# Altium PCB S7CAS-PLEIADES-CARTE-MERE_P01.PcbDoc (part 3 of 9)
Units mil, origin at the board's own origin, x right, y up, seen from the top; angles counter-clockwise.
Board outline 6153 x 3696 mil, 16 copper layers (Top, Ground Plane 1, Signal Layer 1, Ground Plane 2, Signal Layer 2, Ground Plane 3, Power Plane, Ground Plane 4, Ground Plane 5, Power Plane 2, Ground Plane 6, Signal Layer 3, Ground Plane 7, Signal Layer 4, Ground Plane 8, Bottom), stack 75.282 mil thick; 430 components, 328 nets, 2174 pads, 2158 vias.
Unrouted connection lines stored in the file: 202.
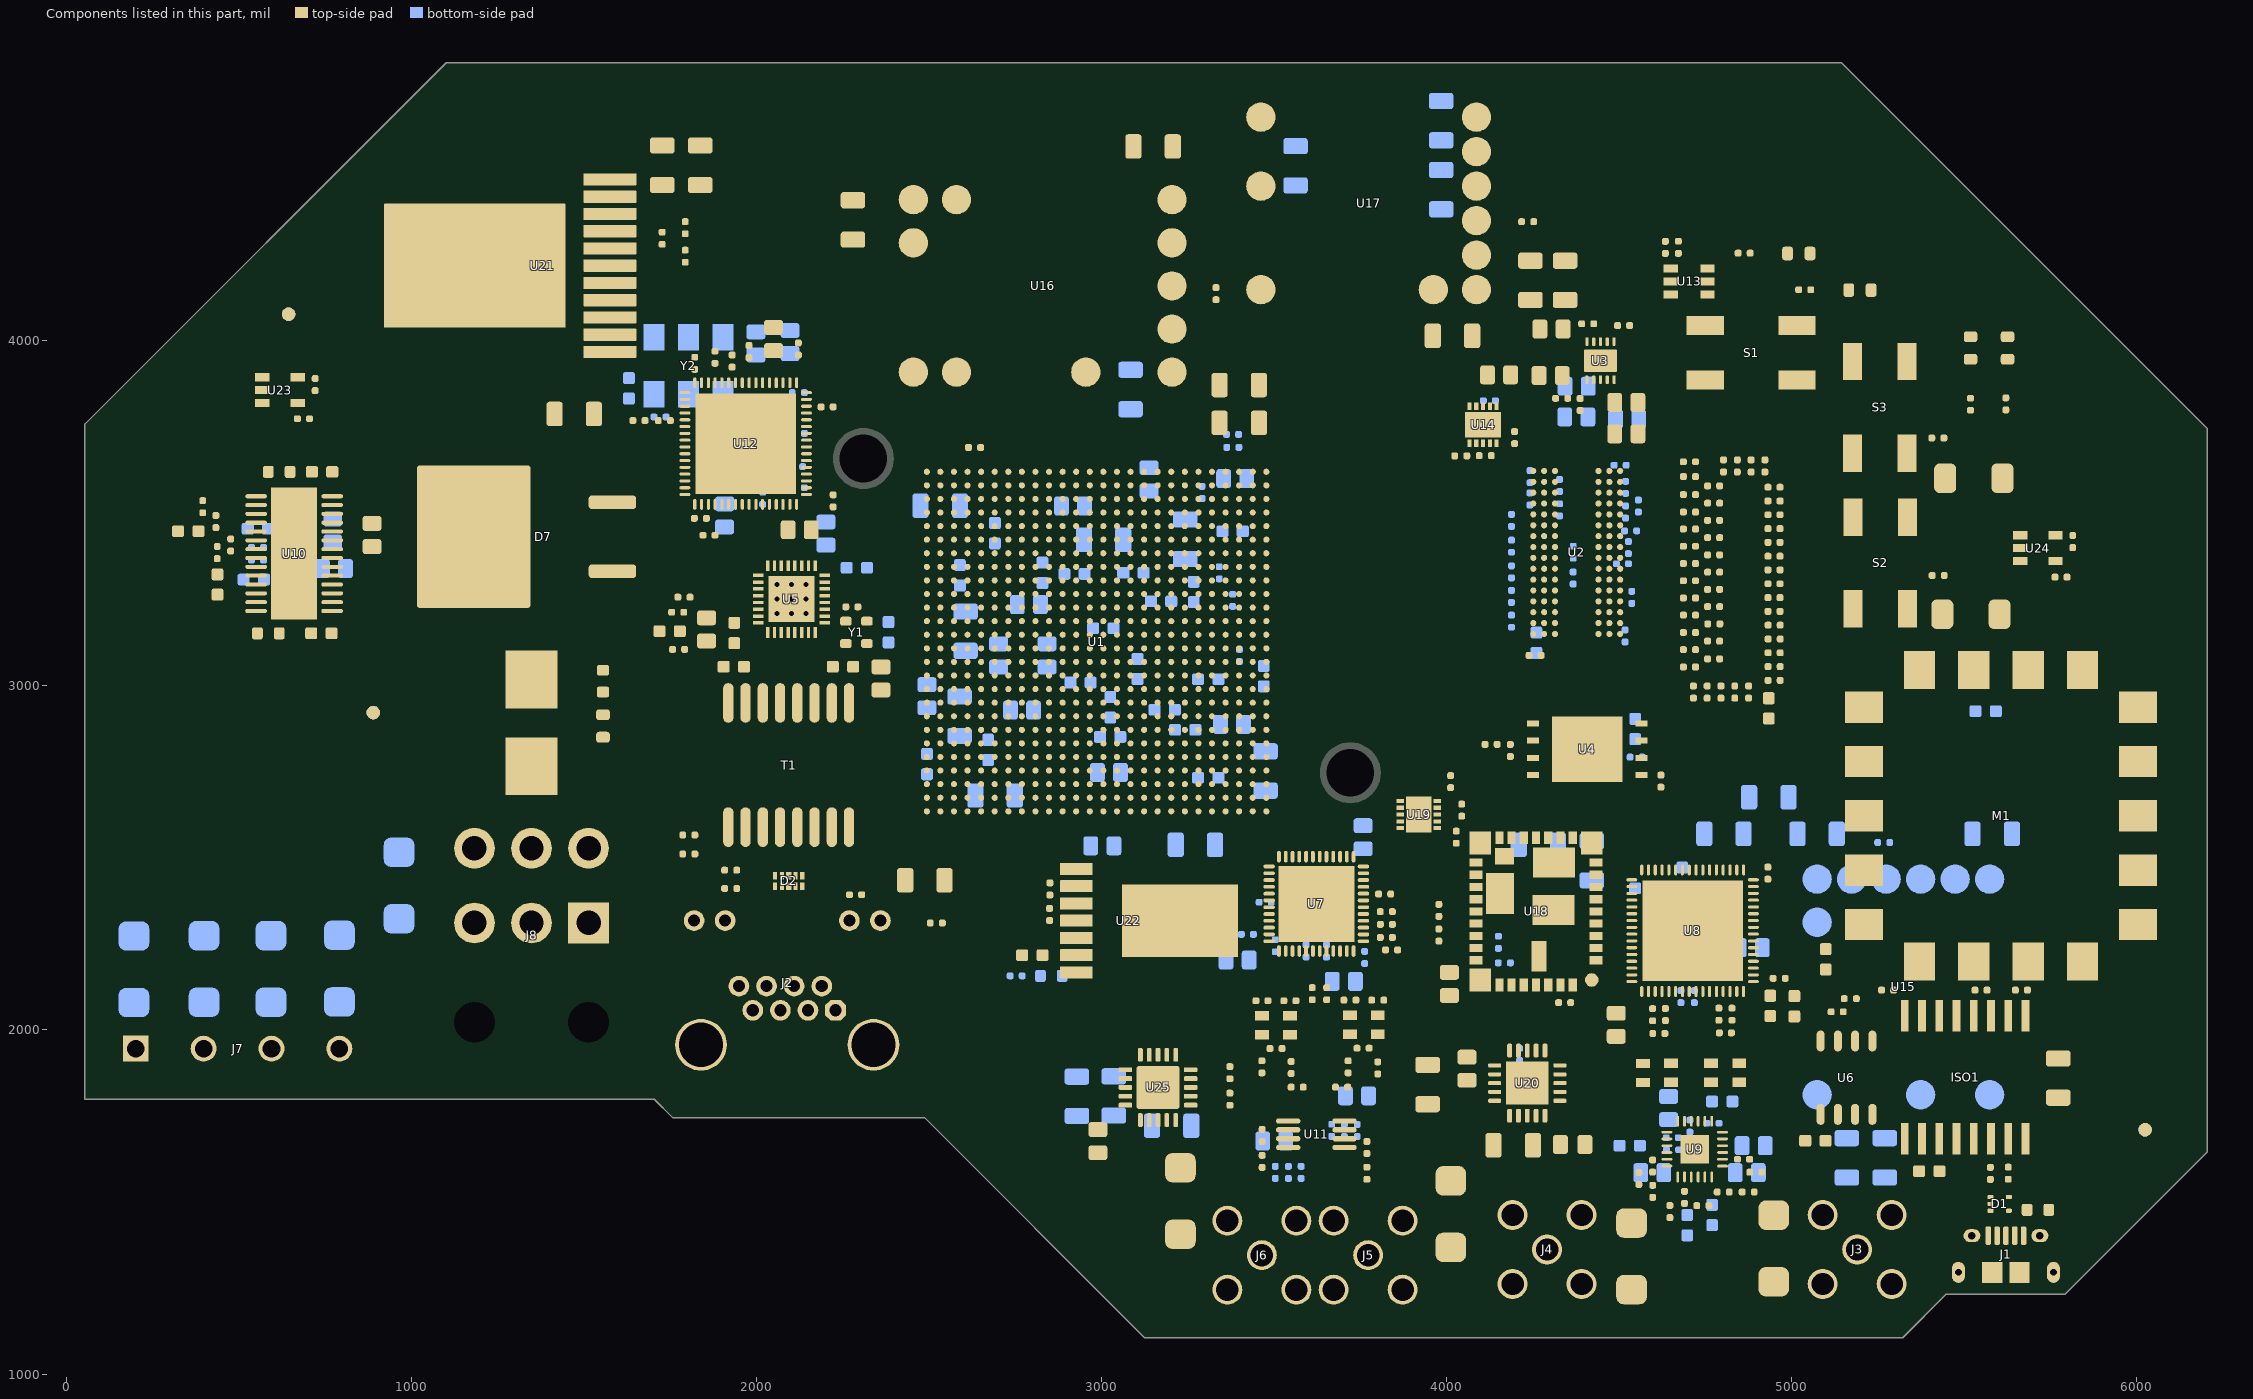
[diagram p16: the components of this part, seen from the top]

## Part data (continued)
R77 R78 R84 R85: "25 Ohms ±0.1% 0.05W, 1/20W Chip Resistor 0402 (1005 Metric) RF, High Frequency Thin Film", Mfg Part Number=FC0402E25R0BTT0, Package=0402, Power=1/20W, Voltage=TBD, CreatedBy="Jonathan Bouchard", Mfg="Vishay Dale Thin Film", Precision=0.01%
R94 R97: "100 mOhms ±1% 0.333W, 1/3W Chip Resistor 0603 (1608 Metric) Automotive AEC-Q200, Current Sense Thick Film", Mfg Part Number=ERJ-3BWFR100V, Package=0603, CreatedBy="Jonathan Bouchard", Mfg="Panasonic Electronic Components", Precision=1%
R100 R101 R102 R103: "750 Ohms ±0.1% 0.063W, 1/16W Chip Resistor 0402 (1005 Metric) Automotive AEC-Q200 Thin Film", Mfg Part Number=ERA-2ARB751X, Package=0402, Power=1/16W, Voltage=50V, CreatedBy="Jonathan Bouchard", Mfg="Panasonic Electronic Components", Precision=1%
R104 R112: "100 kOhms ±1% 0.063W, 1/16W Chip Resistor 0402 (1005 Metric) Moisture Resistant Thick Film", Mfg Part Number=RC0402FR-07100KL, Package=0402, Power=1/16W, Voltage=75V, CreatedBy="Jonathan Bouchard", Part Number #1=RC0402FR-07100KL, Precision=1%
R107: "11.1 kOhms ±0.1% 0.167W, 1/6W Chip Resistor 0603 (1608 Metric) Automotive AEC-Q200 Thin Film", Mfg Part Number=RNCF0603BTE11K1, Package=0603, CreatedBy="Jonathan Bouchard", Mfg="Stackpole Electronics Inc", Precision=1%
R113: "1.21 kOhms ±1% 0.063W, 1/16W Chip Resistor 0402 (1005 Metric) Automotive AEC-Q200 Thick Film", Mfg Part Number=RMCF0402FT1K21, Package=0402, Power=1/16W, Voltage=50V, CreatedBy="Jonathan Bouchard", Mfg="Stackpole Electronics Inc", Precision=1%
R114: "4.12 kOhms ±0.1% 0.063W, 1/16W Chip Resistor 0402 (1005 Metric) Automotive AEC-Q200 Thin Film", Mfg Part Number=ERA-2AEB4121X, Package=0402, Power=1/16W, Voltage=50V, CreatedBy="Jonathan Bouchard", Mfg="Panasonic Electronic Components", Precision=1%
R115 R116: "4.75 kOhms ±0.1% 0.063W, 1/16W Chip Resistor 0402 (1005 Metric) Automotive AEC-Q200 Thin Film", Mfg Part Number=ERA-2AEB4751X, Package=0402, Power=1/16W, Voltage=50V, CreatedBy="Jonathan Bouchard", Mfg="Panasonic Electronic Components", Precision=1%
R117: "3.57 kOhms ±1% 0.063W, 1/16W Chip Resistor 0402 (1005 Metric) Moisture Resistant Thick Film", Mfg Part Number=RC0402FR-073K57L, Package=0402, Power=1/16W, Voltage=50V, CreatedBy="Jonathan Bouchard", Mfg=YAGEO, Precision=1%
R118: "1.15 kOhms ±1% 0.1W, 1/10W Chip Resistor 0603 (1608 Metric) Automotive AEC-Q200 Thick Film", Mfg Part Number=ERJ-3EKF1151V, Package=0402, Power=1/16W, Voltage=50V, CreatedBy="Jonathan Bouchard", Mfg="Panasonic Electronic Components", Precision=1%
R120: "174 kOhms ±1% 0.063W, 1/16W Chip Resistor 0402 (1005 Metric) Moisture Resistant Thick Film", Mfg Part Number=RC0402FR-07174KL, Package=0402, Power=1/16W, Voltage=50V, CreatedBy="Jonathan Bouchard", Mfg=YAGEO, Precision=1%
R121: "11.5 kOhms ±1% 0.063W, 1/16W Chip Resistor 0402 (1005 Metric) Moisture Resistant Thick Film", Mfg Part Number=RC0402FR-0711K5L, Package=0402, Power=1/16W, Voltage=50V, CreatedBy="Jonathan Bouchard", Mfg=YAGEO, Precision=1%
R123 R128 R134: "10 kOhms ±1% 0.063W, 1/16W Chip Resistor 0402 (1005 Metric) Moisture Resistant Thick Film", Mfg Part Number=RC0402FR-0710KL, Package=0402, Power=1/16W, Voltage=50V, CreatedBy="Jonathan Bouchard", Mfg=YAGEO, Precision=1%
R124: "53 kOhms ±0.1% 0.063W, 1/16W Chip Resistor 0402 (1005 Metric) Thin Film", Mfg Part Number=RT0402BRD0753KL, Package=0402, Power=1/16W, Voltage=50V, CreatedBy="Jonathan Bouchard", Mfg=YAGEO, Precision=1%
R125: "332 kOhms ±0.1% 0.25W, 1/4W Chip Resistor 1206 (3216 Metric) Automotive AEC-Q200 Thin Film", Mfg Part Number=ERA-8AEB3323V, Package=1206, CreatedBy="Jonathan Bouchard", Mfg="Panasonic Electronic Components", Precision=1%
R126: "102 kOhms ±0.05% 0.125W, 1/8W Chip Resistor 0805 (2012 Metric) Anti-Sulfur, Automotive AEC-Q200, Moisture Resistant Thin Film", Mfg Part Number=TNPU0805102KAYEA00, Package=0805, CreatedBy="Jonathan Bouchard", Mfg="Vishay Dale", Precision=1%
R127: "65.7 kOhms ±0.5% 0.1W, 1/10W Chip Resistor 0603 (1608 Metric) Thin Film", Mfg Part Number=RT0603DRE0765K7L, Package=0603, CreatedBy="Jonathan Bouchard", Mfg=YAGEO, Precision=1%
R133: "25.5 kOhms ±0.1% 0.063W, 1/16W Chip Resistor 0402 (1005 Metric) Automotive AEC-Q200 Thin Film", Mfg Part Number=ERA-2AEB2552X, Package=0402, Power=1/16W, Voltage=50V, CreatedBy="Jonathan Bouchard", Mfg="Panasonic Electronic Components", Precision=1%
S1 S2 S3: library part SWI_TACT_B3SN-3012P_1, "SWI - SWITCH TACTILE SPST-NO 0.05A 24V -SMD", Current Rating=50mA, Manufacturer #1="Omron Electronics Inc-EMC Div", Package=SMD, Supplier Part Number 1=SW261CT-ND, Temperature="-25°C ~ 70°C", Voltage Rating=24VDC, CreatedBy/Date="Olivier Bernard / 5/12/2017", Cryo=UNKNOWN, GRAMS Lib Spec=2.8, HelpURL=http://omronfs.omron.com/en_US/ecb/products/pdf/en-b3sn.pdf, Magnetic Material=UNKNOWN, Mfg Part Number=B3SN-3012P, Part Number #1=B3SN-3012P, Polarized=No, Supplier 1=Digi-Key, VerifiedBy="Caroline Paulin / 11 juillet 2018"
T1: library part TRANSFO_H1102NLT, "TRANSFO - ETHERNET 10/100B-TX - SMD-16", Package=SMD-16, Supplier Part Number 1=553-1532-1-ND, Temperature="-40°C to 85°C", CreatedBy="Jonathan Bouchard", HelpURL=http://media.digikey.com/pdf/Data%20Sheets/Pulse%20PDFs/10_100BASE-T%20Single%20Port%20SMD%20Magnetics_Rev2008.pdf, Mfg="Pulse Eng.", Mfg Part Number=H1102NLT, Part Number #1=H1102NLT, Supplier 1=Digikey
U1: library part FPGA_XC6SLX100-3FGG676C, "FPGA - XILINX SPARTAN 6 480 I/O - BGA-676", Package=BGA-676, Supplier Part Number 1=122-1760-ND, Temperature="0°C ~ 85°C (TJ)", Voltage="1.14 V ~ 1.26 V", CreatedBy="Jonathan Bouchard", HelpURL=https://www.xilinx.com/support/documentation/data_sheets/ds162.pdf, Mfg=Xilinx, Mfg Part Number=XC6SLX100-3FGG676C, Part Number #1=XC6SLX100-3FGG676C, Supplier 1=Digikey
U2: library part "MEM_DDR3_MT41J128M16JT-125:K TR", "MEM - DDR3 SDRAM 2GBIT 800MHZ - TFBGA-96", Package=TFBGA-96, Supplier Part Number 1=557-1611-1-ND, Temperature="0°C ~ 95°C (TC)", Voltage="1.425 V ~ 1.575 V", CreatedBy="Jonathan Bouchard", HelpURL=http://www.micron.com/~/media/Documents/Products/Data%20Sheet/DRAM/DDR3/2Gb_DDR3_SDRAM.pdf, Mfg=Micrel, Mfg Part Number=MT41J128M16JT-125, Part Number #1=MT41J128M16JT-125, Supplier 1=Digikey
U3: library part REG_PMIC_TPS51200DRCT, "REG - DDR TERMINATION/REF REG - 10-VFDFN", Current Rating="Source: 3A~4.5A, Sink: 3.5A~5.5A", Manufacturer #1="Texas Instruments", Package=10-VFDFN, Supplier Part Number 1=296-23830-1-ND, Temperature="-40°C ~ 85°C", Voltage Rating="2.375V ~ 3.5V", CreatedBy/Date="Joel Lemay 2019-03-19", Cryo=UNKNOWN, GRAMS Lib Spec=2.8, HelpURL=http://www.ti.com/lit/ds/symlink/tps51200.pdf, Magnetic Material=Unknown, Mfg Part Number=TPS51200DRCT, Part Number #1=TPS51200DRCT, Polarized=Yes, Supplier 1=Digi-Key, VerifiedBy="Nicolas V. (2019-05-31)"
U4: library part CMP-0677-00004-1, "Low-Voltage, Serial Flash Memory with SPI Bus Interface, 128 Mbit, 54 MHz, 2.7 to 3.6 V, 8-Pin VDFPN (MLP), RoHS, Tape and Reel", Generic Part Number=M25P128, Supply Voltage Max="3.6 V", Supply Voltage Min="2.7 V", Temperature Max="85 degC", Temperature Min="-40 degC", DatasheetVersion="Rev. 6", Memory Size="128 Mbits", Mfg Part Number=M25P128-VME6TGB, PackageDescription="8-Pin Very Thin Dual Flat Package No lead, Body 8 x 6 mm, Pitch 1.27 mm", Packing="Tape and Reel", Part Number #1=M25P128-VME6TGB, PartNumber=M25P128-VME6TGB, RoHS=TRUE
U5: library part COM_ETH_PHY_KSZ8091MNXCA, "COM - ETHERNET PHY 10/100 - QFN-32", Package=QFN-32, Supplier Part Number 1=576-4356-ND, Temperature="0°C ~ 70°C", Voltage="1.8V, 2.5V, 3.3V", CreatedBy="Jonathan Bouchard", HelpURL=http://ww1.microchip.com/downloads/en/DeviceDoc/00002275A.pdf, Mfg=Micrel, Mfg Part Number=KSZ8091MNXCA, Part Number #1=KSZ8091MNXCA, Supplier 1=Digikey
U6: library part ISO_SI8620BB-B-IS, "ISO - Dual-Channel Digital Isolator (default Low) - 8-SOIC", Manufacturer #1="Silicon Labs", Package=8-SOIC, Supplier Part Number 1=336-2567-ND, Temperature="-40°C ~ 125°C", Voltage Rating=2.5-5.5V, CreatedBy/Date="Joel Lemay 2018-06-05", Cryo=UNKNOWN, GRAMS Lib Spec=2.8, HelpURL=https://www.silabs.com/documents/public/data-sheets/si861x-2x-datasheet.pdf, Magnetic Material=Unknown, Mfg Part Number=SI8620BB-B-IS, Part Number #1=SI8620BB-B-IS, Polarized=Yes, Supplier 1=Digi-Key, VerifiedBy="Caroline Paulin - 12 sept 2018"
U7: library part DAC_AD9146BCPZ, "DAC - 16BIT SRL HIGH SPEED - QFN-48", Package=QFN-48, Supplier Part Number 1=AD9146BCPZ-ND, Temperature="-40°C ~ 85°C", Voltage="3.13 V ~ 3.47 V / 1.71 V ~ 1.89 V", CreatedBy="Jonathan Bouchard", HelpURL=http://www.analog.com/media/en/technical-documentation/data-sheets/AD9146.PDF, Mfg="Analog Devices Inc.", Mfg Part Number=AD9146BCPZ, Precision="16 Bit", Supplier 1=Digikey
U8: library part ADC_ADS62P48IRGCT, "ADC - 14 BIT 210MSPS SUAL - VQFN-64", Package=VQFN-64, Supplier Part Number 1=296-24611-1-ND, Temperature="-40°C ~ 85°C", Voltage="3.15 V ~ 3.6 V / 1.7 V ~ 1.9 V", CreatedBy="Jonathan Bouchard", HelpURL=http://www.ti.com/lit/ds/symlink/ads62p48.pdf, Mfg="Texas Instruments", Mfg Part Number=ADS62P48IRGCT, Precision="14 Bit", Supplier 1=Digikey
U9: library part OPAMP_ADA4927-2YCPZ-R2, "OPAMP - CFA 2.3GHZ - QFN-24", Current=65mA, Package=QFN-24, Supplier Part Number 1=ADA4927-2YCPZ-R2CT-ND, Temperature="-40°C ~ 105°C", Voltage="4.5 V ~ 11 V, ±2.25 V ~ 5.5 V", CreatedBy="Jonathan Bouchard", HelpURL=http://www.analog.com/media/en/technical-documentation/data-sheets/ADA4927-1_4927-2.pdf, Mfg="Analog Devices", Mfg Part Number=ADA4927-2YCPZ-R2, Supplier 1=Digikey
U10: library part POW_MOTOR_DRV8811PWPR, "POW - STEPPER MOTOR DRIVER - SOP-28", Package=SOP-28, Supplier Part Number 1=296-24591-1-ND, Temperature="-40°C ~ 150°C (TJ)", Voltage="3 V ~ 5.5 V / 8 V ~ 38 V", CreatedBy="Jonathan Bouchard", HelpURL=http://www.ti.com/lit/ds/symlink/drv8811.pdf, Mfg="Texas Instrument", Mfg Part Number=DRV8811PWPR, Supplier 1=Digikey
U11: library part OPAMP_AD8056ARMZ, "OPAMP - VFB 300MHZ - 8MSOP", Current=60mA, Package=MSOP-8, Supplier Part Number 1=AD8056ARMZ-REEL7CT-ND, Temperature="-40°C ~ 125°C", Voltage="8 V ~ 12 V, ±4 V ~ 6 V", CreatedBy="Jonathan Bouchard", HelpURL=http://www.analog.com/media/en/technical-documentation/data-sheets/AD8055_8056.pdf, Mfg="Analog Devices", Mfg Part Number=AD8056ARMZ, Supplier 1=Digikey
U12: library part TIM_CDCE62005RGZT, "TIM - CLK SYNTH JITTER CLEANER 3:5 - QFN-48", Package=QFN-48, Supplier Part Number 1=296-23947-1-ND, Temperature="-40°C ~ 85°C", Voltage="3 V ~ 3.6 V", CreatedBy="Jonathan Bouchard", HelpURL=http://www.ti.com/lit/ds/symlink/cdce62005.pdf, Mfg="Texas Instruments", Mfg Part Number=CDCE62005RGZT, Supplier 1=Digikey
U13: library part POW_RESET_TPS3808G01DBVR, "POW - VOLT SUPERVISOR ADJ - SOT23-6", Package=SOT23-6, Supplier Part Number 1=296-17188-6-ND, Temperature="-40°C ~ 125°C (TJ)", CreatedBy="Jonathan Bouchard", HelpURL=http://www.ti.com/lit/ds/symlink/tps3808.pdf, Mfg="Texas Instruments", Mfg Part Number=TPS3808G01DBVR, Supplier 1=Digikey
U14 U19: library part REG_LDO_NCP59744MN1ADJTBG, "REG - LINEAR POS ADJ 3A BIAS - 10-VFDFN", Current Rating=3A, Manufacturer #1="ON Semiconductor", Manufacturer #2=-, Package=10-VFDFN, Power Max=10.8W, Supplier Part Number 1=NCP59744MN1ADJTBGOSCT-ND, Temperature="-40°C ~ 125°C (TJ)", Voltage Rating="(Vout+VDO) ~ 5.5V", CreatedBy/Date="Raphael Bouchard / 2019-06-07", Cryo=UNKNOWN, GRAMS Lib Spec=2.8, HelpURL=https://www.onsemi.com/pub/Collateral/NCP59744-D.PDF, Magnetic Material=Unknown, Mfg Part Number=NCP59744MN1ADJTBG, Part Number #1=NCP59744MN1ADJTBG, Part Number #2=-, Polarized=Yes, Supplier 1=Digi-Key, Tolerance=-, VerifiedBy="C.Paulin - 13/06/2019"
U15 U17: library part REG_SWR_PTH04T231WAZ, "REG - MODULE PIP 6A 2.2V/5.5V - 10SMD", Current Rating="6A (out)", Manufacturer #1="Texas Instruments", Package=SMD, Supplier Part Number 1=296-21792-ND, Temperature="-40°C ~ 85°C", Voltage Rating="2.2-5.5V (Input)", CreatedBy/Date="Olivier Bernard / 6/5/2018", Cryo=UNKNOWN, HelpURL=http://www.ti.com/lit/ds/symlink/pth04t231w.pdf, Magnetic Material=UNKNOWN, Mfg Part Number=PTH04T231WAZ, Part Number #1=PTH04T231WAZ, Polarized=Yes, Supplier 1=Digi-Key, VerifiedBy="Caroline Paulin / 10 juillet 2018"
U16: library part REG_SWR_PTH08T241WAZ, "REG - MODULE PIP 10A 14VIN - 11-SMD", Current Rating="10A (out)", Manufacturer #1="Texas Instruments", Package=SMD, Supplier Part Number 1=296-21339-ND, Temperature="-40°C ~ 85°C", Voltage Rating="4.5-14V (Input), 0.69 - 5.5V (Out)", CreatedBy/Date="Olivier Bernard / 6/5/2018", Cryo=UNKNOWN, HelpURL=http://www.ti.com/lit/ds/symlink/pth08t241w.pdf, Magnetic Material=UNKNOWN, Mfg Part Number=PTH08T241WAZ, Part Number #1=PTH08T241WAZ, Polarized=Yes, Supplier 1=Digi-Key, VerifiedBy="Caroline Paulin / 10 juillet 2018"
U18: library part REG_SWR_LMZ34002RKGR, "REG - DC DC Converter -3V to -17V 2A - 41-B1QFN", Current Rating=2A, Manufacturer #1="Texas Instruments", Package=41-B1QFN, Power Max=15W, Supplier Part Number 1=296-44356-1-ND, Temperature="-40°C ~ 85°C", Voltage Rating=4.5-40V, CreatedBy/Date="P.Marcoux  20-06-2019", Cryo=UNKNOWN, GRAMS Lib Spec=2.8c, HelpURL=http://www.ti.com/lit/ds/symlink/lmz34002.pdf, Magnetic Material=Unknown, Mfg Part Number=LMZ34002RKGR, Part Number #1=LMZ34002RKGR, Polarized=Yes, Supplier 1=Digi-Key, VerifiedBy="C.Paulin - 22/01/2020"
U20: library part REG_LDO_TPS7A3301RGWR, "REG - LDO Negative Adjustable 1 Output -1.18V-33V 1A -  20-VQFN (5x5)", Current Rating=1A, Manufacturer #1="Texas Instruments", Package=20-VQFN, Supplier Part Number 1=296-39502-1-ND, Temperature="-40°C ~ 125°C", Voltage Rating=-36V, CreatedBy/Date="Keven Deslandes - 2018/10/11", Cryo=UNKNOWN, GRAMS Lib Spec=2.8, HelpURL=http://www.ti.com/lit/ds/symlink/tps7a33.pdf, Magnetic Material=Unknown, Mfg Part Number=TPS7A3301RGWR, Part Number #1=TPS7A3301RGWR, Polarized=Yes, Supplier 1=Digi-Key, VerifiedBy="Caroline Paulin - 11/12/2018"
U21: library part CMP-0069-02067-2, "10A SIMPLE SWITCHER® Power Module with 36V Maximum Input Voltage and Current Sharing, 11 pin TO-PMOD, 32 Rail", Manufacturer="Texas Instruments", PackageTopMarking=NSUZXYTTE#*LMZ23610, PowerWise=N, PackageDescription="TO-PMOD, 15 x 15 x 5.9 mm Body, 11 Lead, 1.27 mm Pitch, Surface Mount", PackageReference=NDY0011A, PinCount=11, RoHS=Y
U22: library part CMP-0069-02076-2, "3A SIMPLE SWITCHER® Power Module with 36V Maximum Input Voltage, 7 pin TO-PMOD, 250 Reel", Manufacturer="Texas Instruments", PackageTopMarking=NSUZXYTTE#*LMZ23603, PowerWise=N, ComponentLink1Description="Datasheet URL", ComponentLink1URL=http://www.ti.com/general/docs/lit/getliterature.tsp?genericPartNumber=LMZ23603&fileType=pdf, CompType=Switcher, PackageDescription="TO-PMOD-7, 10.16 x 9.85 x 4.57 mm Body, 7 Lead, 1.27mm Pitch, Surface Mount", PackageReference=NDW0007A, PinCount=7, RoHS=Y